# Altium PCB pcb.PcbDoc
Units mm, origin at the board's own origin, x right, y up, seen from the top; angles counter-clockwise.
Board outline 64.06 x 38.05 mm, 2 copper layers (Top Layer, Bottom Layer); 18 components, 14 nets, 73 pads, 7 vias.
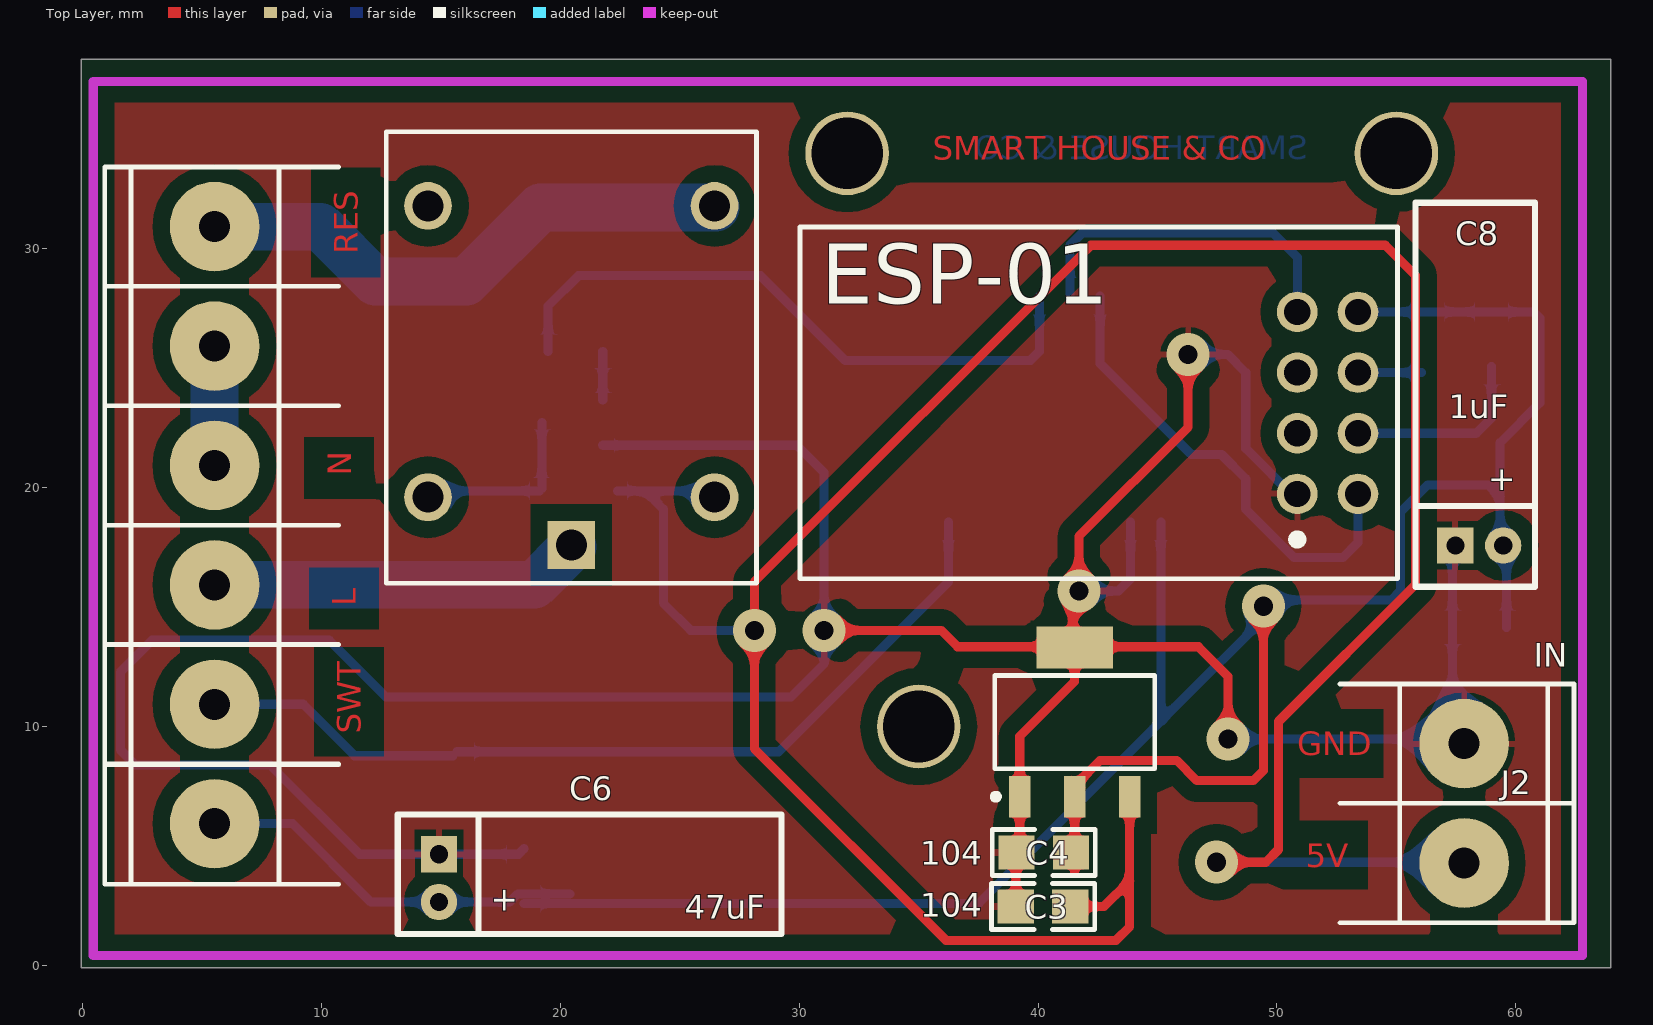
[diagram p0: Top Layer view]
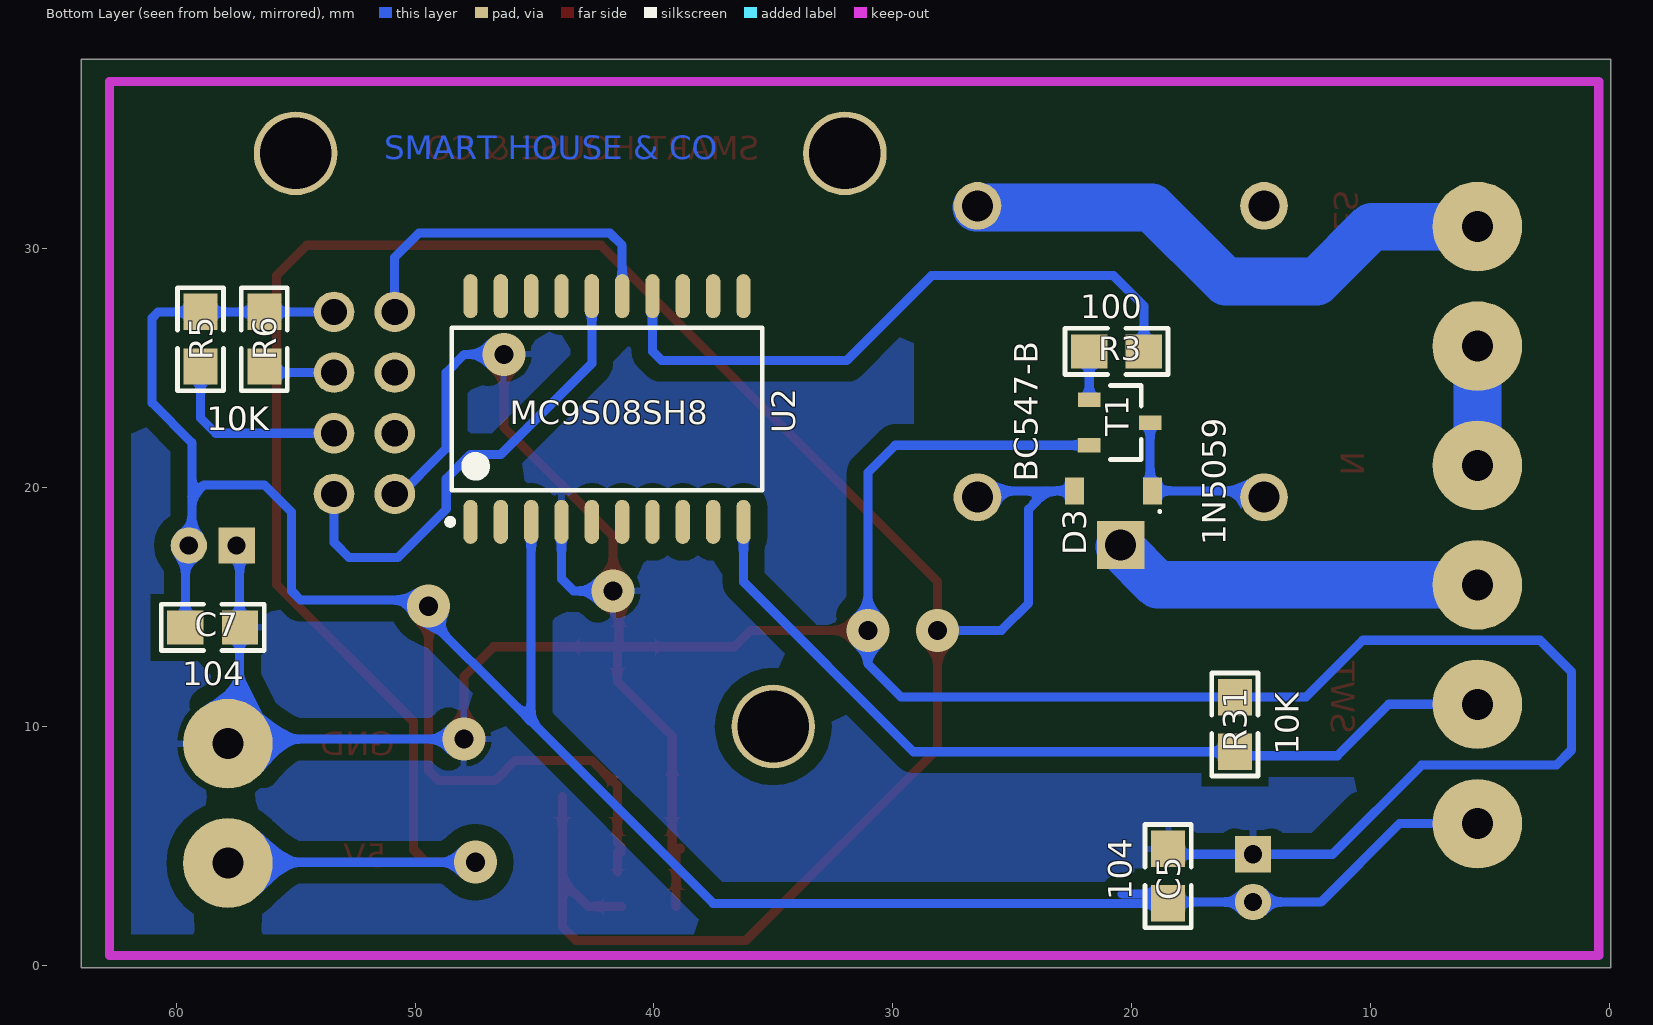
[diagram p1: Bottom Layer view, seen from below]

## Layer stack, top to bottom
Top Solder: solder mask 0.0102, Solder Resist, Dk 3.5
Top Layer: signal copper 0.0356
Dielectric 1: dielectric 0.32, FR-4, Dk 4.8
Bottom Layer: signal copper 0.0356
Bottom Solder: solder mask 0.0102, Solder Resist, Dk 3.5

## Board outline
-0.076,-0.102 63.983,-0.102 63.983,37.948 -0.076,37.948

## Design rules (kind name [scope] priority, off if disabled: settings)
Clearance POLYGON [All vs InPolygon] p1: gap=0.7
Clearance [All] p2: gap=0.254
PolygonConnect [All] p1: connectstyle=Relief reliefconductorwidth=0.254 reliefentries=4 polygonreliefangle="90 Angle" airgapwidth=0.254
RoutingVias [All] p1: holewidth=0.711 width=1.27 viastyle="Through Hole" minholewidth=0.711 minwidth=1.27 maxholewidth=0.711 maxwidth=1.27
SolderMaskExpansion [All] p1: expansion=0.102
UnpouredPolygon [All] p1: allowunpoured=FALSE
Width [All] p1: maxlimit=2 minlimit=0.254 preferedwidth=0.381 toplayer_maxwidth=0.508 minimp=50.000000 maximp=50.000000 favimp=50.000000
29 further rules are at their usual default settings.

## Classes and differential pairs
component class esq: *1 C3 C4 C5 C6 C7 C8 D3 J2 R3 R5 R6 R31 T1 U2 U52 ""

## Components (designator, comment, footprint, x,y, rotation, side; value= is the part's Value field where it differs from the comment)
*1 "RELE SIMPLE" "RELE SERIE 943" 12.7,16.002 r90 top
C3 "104" 0805 40.208,2.464 r180 top
C4 "104" 0805 40.234,4.724 r180 top
C5 "104" 0805 18.466,3.737 r270 bottom
C6 "47uF" CAP100RP 14.91,3.653 r90 top
C7 "104" 0805 58.471,14.151 r180 bottom
C8 "1uF" CAP100RP 58.471,17.58 r180 top
D3 "1N5059" Diodo 20.752,19.866 r0 bottom
J2 "IN" BORNERA2 57.836,6.785 r180 top
J95 "OUT" BORNERA6 5.512,18.415 r0 top
R3 "100" 0805 20.625,25.708 r180 bottom
R5 "10K" 0805 58.979,26.216 r270 bottom
R6 "10K" 0805 56.312,26.216 r270 bottom
R31 "10K" 0805 15.672,10.087 r90 bottom
T1 "BC547-B" SOT23 21.768,23.676 r270 bottom
U1 "ESP-01" ESP-01 53.391,19.739 r90 top
U2 "MC9S08SH8" SH8 41.961,23.295 r90 bottom
U52 "AMS1117" AMS1117 41.529,10.185 r90 top

## Footprints (in the part's own frame and the unit in brackets; to place one, negate y for a bottom-side part, rotate by r counter-clockwise, add the part's x,y. Pads: shape width x height; smd on the part's side, far side on the other; paste and mask are expansions set on the pad)
0805 [mil] "Pasivo 0805"
  rect 60x56 smd: 1(-45,0) 2(45,0)
  silkscreen extent -85,-38 85,38, body extent -40,-25 39,25, height 15
AMS1117 [mm] "SOT223, 4-Leads, Body 6,50x7,00mm (avg), Pitch 2,30mm, IPC Medium Density"
  rect 1.75x0.9 smd: 1(-3.125,-2.3) 2(-3.125,2.3) 3(-3.125,0)
  rect 1.75x3.2 smd: 2(3.125,0)
  silkscreen extent -3.25,-3.35 1.95,3.42, body extent -3.48,-3.25 3.48,3.25, height 1.7
BORNERA2 [mm] "Bornera con Tornillos 5mm separaci�n"
  round 3.75 hole 1.3: 1(0,2.5) 2(0,-2.5)
  silkscreen extent -4.6,-5 5.2,5, body extent -3.76,-4.89 3.94,5.61, height 10
BORNERA6 [mm] "Bornera con Tornillos 5mm separaci�n"
  round 3.75 hole 1.3: 1(0,12.517) 2(0,7.517) 3(0,2.516) 4(0,-2.484) 5(0,-7.484) 6(0,-12.484)
  silkscreen extent -4.6,-15.02 5.2,15.02, body extent -3.76,-14.86 3.94,15.62, height 10.05
CAP100RP [mil] "Body diameter 5mm"
  round 60 hole 30: 1(-39.37,0)
  rect 60x60 hole 30: 2(39.37,0)
  silkscreen extent -92,-565 105,68, body extent -97,-566 107,-65, height 220
Diodo [mm] "SODFL, 2-Leads, Body 1,60x3,60mm, IPC Medium Density"
  rect 0.81x1.12 smd: 1(-1.635,0) 2(1.635,0)
  silkscreen extent -1.99,0.81 -1.89,0.91, body extent -1.4,-0.85 1.4,0.85, height 1.3
ESP-01 [mm]
  round 1.7 hole 1.1: 1(0,2.54) 2(2.54,2.54) 3(5.08,2.54) 4(7.62,2.54) 5(0,0) 6(2.54,0) 7(5.08,0) 8(7.62,0)
  silkscreen extent -3.56,-1.65 11.18,23.37, body extent -3.43,-1.52 11.07,23.28, height 14.88
"RELE SERIE 943" [mm]
  round 2 hole 1.3: B1(3.6,-13.75) B2(3.6,-1.75) NA1(15.8,-13.75) NC1(15.8,-1.75)
  rect 2x2 hole 1.3: C1(1.6,-7.75)
  silkscreen extent 0,-15.5 18.9,0, body extent 0.03,-15.75 19.03,0.25, height 15.75
SH8 [mm] "SOP, 20-Leads, Body 12,80x7,50mm, Pitch 1,27mm, IPC Medium Density"
  oval 1.85x0.6 smd: 1(-4.725,5.715) 2(-4.725,4.445) 3(-4.725,3.175) 4(-4.725,1.905) 5(-4.725,0.635) 6(-4.725,-0.635) 7(-4.725,-1.905) 8(-4.725,-3.175) 9(-4.725,-4.445) 10(-4.725,-5.715) 11(4.725,-5.715) 12(4.725,-4.445) 13(4.725,-3.175) 14(4.725,-1.905) 15(4.725,-0.635) 16(4.725,0.635) 17(4.725,1.905) 18(4.725,3.175) 19(4.725,4.445) 20(4.725,5.715)
  silkscreen extent -4.85,-6.5 3.4,6.69, body extent -3.8,-6.5 3.8,6.5, height 2.65
SOT23 [mm]
  rect 0.6x0.95 smd: 1(0,0) 2(0.95,2.55) 3(1.9,0)
  silkscreen extent -0.6,0.87 2.5,2.17, body extent -0.53,-0.25 2.47,2.88, height 1

## Part data
C3 C4 C5 C7: library part CAP, "cap"
C6 C8: library part CAPPOL, "Cap polarizado"
D3: library part "DIODO SCHOTTKY", "Diodo"
J2: library part Bornera_2, "Bornera de 2 pines"
J95: library part "BORNERA 6"
R3 R5 R6 R31: library part RES, "Resistencia"
T1: library part "TRANSISTOR NPN"
U2: "Micro controlador"

## Free pads (board coordinates)
  round 3.5 hole 3: 0(32,34) 0(35,10) 0(55,34)

## Via types
v1: diameter 1.8, hole 0.8, Top Layer to Bottom Layer, 7 vias

## Nets (pads, with @x,y where several pads share a name; then routed paths per layer and width w, separated by ;. In a path a pad name is that pad's centre, name@x,y a point inside that pad or via, vN(x,y) a via of type N, cw(c..) or ccw(c..) an arc to the next point about the centre after c; other vN are vias at no path point)
3V3: C4.1 C5.2 C6.1 C7.1 C8.1 J95.6 R5.1 R6.1 U1.8 U2.3 U52.3 | length 115.5
  Top Layer w0.381: C4.1 41.377,4.978 41.529,5.131 U52.3 41.529,7.518 42.596,8.585 45.796,8.585 46.646,7.736 49.008,7.736 49.428,8.156 v1(49.428,15.037) ; 41.529,3.912 C4.1@41.529,4.724
  Bottom Layer w0.381: J95.6 8.779,5.931 12.057,2.653 C6.1 17.874,2.653 18.212,2.991 20.387,2.991 ; C5.2 37.516,2.594 45.136,10.214 ; U2.3 45.136,10.214 ; U1.8 R6.1 R5.1 60.757,27.359 61.011,27.105 61.011,23.549 59.344,21.882 59.344,19.612 ; C8.1@59.344,17.199 59.344,19.612 ; C7.1 C8.1@59.614,16.929 ; 45.136,10.214 50.216,15.294 54.788,15.294 55.169,15.675 55.169,18.977 56.312,20.12 58.836,20.12 59.344,19.612
5V: *1.B1 C3.1 D3.2 J2.1 U52.1 | length 121.8
  Top Layer w0.381: C3.1 42.748,2.464 43.829,3.545 ; U52.1 43.829,3.545 ; v1(47.473,4.318) 49.53,4.318 50.063,4.851 50.063,10.211 55.804,15.951 55.804,28.883 54.534,30.153 42.215,30.153 28.118,16.056 v1(28.118,14.024) 28.118,9.071 36.148,1.041 43.256,1.041 43.829,1.614 43.829,3.545
  Bottom Layer w0.381: D3.2 23.546,19.866 ; *1.B1@26.164,19.866 23.546,19.866 ; v1(28.118,14.024) 25.447,14.024 24.308,15.164 24.308,19.104 23.546,19.866 ; v1(47.473,4.318) 56.852,4.318 J2.1@57.836,5.301
CALENTADOR: R3.2 U2.14 | length 26.9
  Bottom Layer w0.381: R3.2 19.482,27.613 20.752,28.883 28.372,28.883 31.928,25.327 39.675,25.327 40.056,25.708 U2.14
FASE: *1.C1 J95.4 | length 15.7
  Bottom Layer w2: J95.4 18.903,15.931 *1.C1@20.501,17.529
GND: C3.2 C4.2 C5.1 C6.2 C7.2 C8.2 J2.2 R31.2 T1.3 U1.1 U2.4 U52.2 | length 150.2
  Top Layer w0.381: v1(31.039,14.024) 35.942,14.024 36.627,13.339 U52.2@41.453,13.339 ; C4.2@38.876,4.88 C4.2@38.905,4.91 ; C3.2 39.065,4.699 C4.2 ; C4.2@39.229,4.724 39.229,7.06 39.229,9.587 41.529,11.887 U52.2@41.529,13.31 ; v1@41.453,15.421 U52.2@41.453,13.339 ; v1(41.707,15.675) 41.707,17.961 46.279,22.533 v1(46.279,25.581) ; v1(47.955,9.474) 47.955,12.09 46.706,13.339 U52.2@41.453,13.339
  Bottom Layer w0.381: C5.1 18.239,4.653 C6.2 11.581,4.653 7.852,8.382 2.21,8.382 1.575,9.017 1.575,12.294 2.893,13.612 10.315,13.612 12.696,11.23 R31.2 29.642,11.23 31.039,12.627 v1(31.039,14.024) 31.039,20.628 29.891,21.776 T1.3 ; v1(41.707,15.675) 43.358,15.675 43.866,16.183 U2.4 ; v1(46.279,25.581) 47.93,25.581 48.692,24.819 48.692,21.644 U1.1@50.851,19.485 ; v1(47.955,9.474) 58.663,9.474 57.344,10.793 C8.2@57.344,17.199
Net*1_B2: *1.B2 D3.1 T1.2 | length 7
  Bottom Layer w0.381: *1.B2@14.838,19.866 D3.1 ; D3.1@19.218,19.967 T1.2
NetR3_1: R3.1 T1.1 | length 2
  Bottom Layer w0.381: T1.1 R3.1
NetR5_2: R5.2 U1.6 | length 8
  Bottom Layer w0.381: U1.6 58.344,22.279 58.979,22.914 R5.2
NetR6_2: R6.2 U1.7 | length 2.7
  Bottom Layer w0.381: U1.7 R6.2@56.058,24.819
NEUTRO: J95.2 J95.3 | length 5
  Bottom Layer w2: J95.3 J95.2
OUT_RESISTENCIA: *1.NA1 J95.1 | length 23.2
  Bottom Layer w2: J95.1 9.941,30.932 12.243,28.629 16.053,28.629 19.153,31.729 *1.NA1@26.501,31.729
RXD: U1.4 U2.15 | length 14.6
  Bottom Layer w0.381: U2.15 41.326,30.153 41.834,30.661 49.835,30.661 50.851,29.645 U1.4
SWITCH: J95.5 R31.1 U2.10 | length 36.9
  Bottom Layer w0.381: J95.5 9.225,10.931 11.379,8.777 R31.1@15.505,8.777 ; R31.1 29.134,8.944 36.246,16.056 U2.10
TXD: U1.5 U2.16 | length 20
  Bottom Layer w0.381: U2.16 42.596,25.2 46.406,21.39 47.676,21.39 48.692,20.374 48.692,19.104 50.724,17.072 52.756,17.072 53.391,17.707 U1.5
pads on no net: *1.NC1 U1.2 U1.3 U2.1 U2.2 U2.5 U2.6 U2.7 U2.8 U2.9 U2.11 U2.12 U2.13 U2.17 U2.18 U2.19 U2.20

## Polygon pours and split planes (outlines as drawn)
GND on Bottom Layer "POLYGON" (solid, remove dead copper, pour order 4): 29.108,40.081 29.108,11.201 28.854,10.947 28.397,11.405 -10.16,11.405 -10.16,8.128 -1.727,-0.305 -0.432,-1.6 63.983,-1.6 63.983,38.024 65.151,39.192
GND on Top Layer "POLYGON" (solid, remove dead copper, pour order 3): -4.267,38.887 -2.286,40.869 68.377,40.869 68.377,-0.483 66.04,-2.819 64.135,-0.914 -2.819,-0.914

## Keep-outs
Keep-Out Layer:
  lines w0.381: 0.432,0.406 0.432,37.008 62.789,37.008 62.789,0.406 0.432,0.406

## Other copper
Top Layer:
  text "SMART HOUSE & CO" at 35.585,33.731 h1
  text "RES" at 11.506,29.769 h1 r90
  text "N" at 11.227,20.498 h1 r90
  text "L" at 11.43,15.037 h1 r90
  text "SWT" at 11.633,9.703 h1 r90
  text "GND" at 50.851,8.788 h1
  text "5V" at 51.206,4.115 h1
Bottom Layer:
  text "SMART HOUSE & CO" at 51.283,33.757 h1

## Silkscreen, mask and mechanical layers (free items; w line width, h text height)
Mechanical 15:
  lines w0.381: 63.297,-0.102 63.983,-0.102 63.983,37.948 -0.076,37.948 -0.076,-0.102 64,-0.102

## Text inside footprints (layer, text, board x,y; h text height)
C6: Top Overlay "+" at 18.085,2.129 h1.02 r90
C8: Top Overlay "+" at 59.995,20.755 h1.02 r180